# Allegro board EGR 314.brd
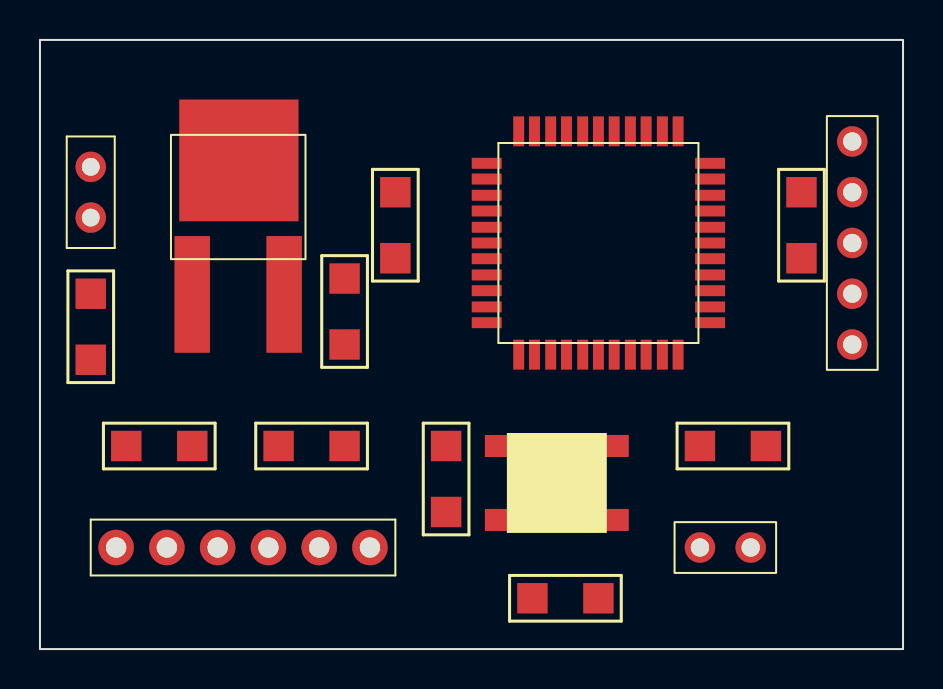
[diagram p0: board, top side]
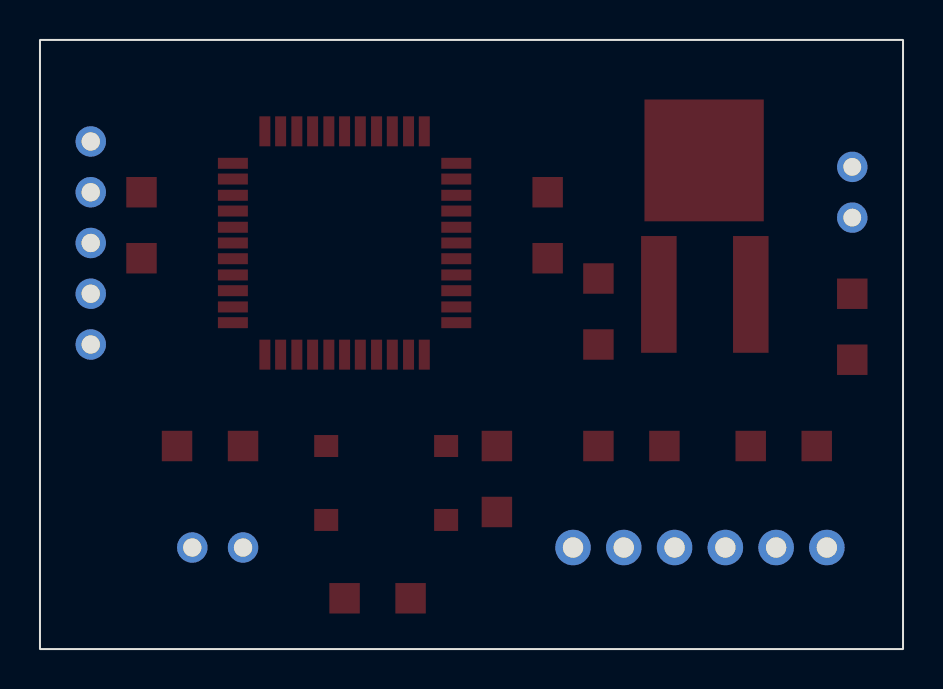
[diagram p1: board, bottom side, seen from below]

Outline 43.18 x 30.48 mm; copper layers: TOP, BOTTOM. Coordinates in mm from the lower left corner of the outline.
Outline path: rectangle 0,0 43.18,30.48

## Placement (name value [footprint] x y rotation side)
BT1  7.2V  [HEADER2]  2.54 22.86 0 top
C1  0.1uF, 15V  [SMC1206]  2.54 17.78 270 top
C2  0.1uF, 15V  [SMC1206]  15.24 15.24 90 top
C3  0.1uF, 15V  [SMC1206]  38.1 22.86 270 top
C4  0.1 uF, 15V  [SMC1206]  27.94 2.54 180 top
C5  0.1uF, 15V  [SMC1206]  17.78 22.86 270 top
J1  JUMPER  [JUMPER2]  33.02 5.08 0 top
J2  CON6  [HEADER6]  10.16 5.08 270 top
J3  HEADER 5  [JUMPER5]  40.64 15.24 90 top
R1  10 kohm, 1/4W  [SMR1206]  33.02 10.16 0 top
R2  220 ohm, 1/4W  [SMR1206]  20.32 10.16 270 top
R3  22 ohm, 1/4W  [SMR1206]  7.62 10.16 180 top
R4  22 ohm, 1/4W  [SMR1206]  15.24 10.16 180 top
SW1  SW PUSHBUTTON-SPST-2  [SMDSWITCH]  22.86 10.16 0 top
U1  LD29150DT33R  [TO252AA]  7.62 17.78 0 top
U2  PIC18F47K40-I/PT  [TQFPPIC18F47K40]  27.94 20.32 0 top

## Library data of the parts
BT1 = BATTERY
C1-C5 = CAP NP
J1 = JUMPER: User Part Number: ***
J2 = CON6
J3 = HEADER 5: User Part Number: ***
R1-R4 = R
SW1 = SW PUSHBUTTON-SPST-2
U1 = LD29150DT33R
U2 = PIC18F47K40-I/PT_2

## Footprints (pads in the part's own frame, mm; a bottom-side part is the same pattern mirrored in y, then rotated)
HEADER2
  round 1.524 hole 0.889: 1(0,1.27) 2(0,-1.27)
HEADER6
  round 1.778 hole 1.016: 1(0,6.35) 2(0,3.81) 3(0,1.27) 4(0,-1.27) 5(0,-3.81) 6(0,-6.35)
JUMPER2
  round 1.524 hole 0.914: 1(0,0) 2(2.54,0)
JUMPER5
  round 1.524 hole 0.914: 1(0,0) 2(2.54,0) 3(5.08,0) 4(7.62,0) 5(10.16,0)
SMC1206
  rect 1.524x1.524 smd: 1(0,0) 2(3.302,0)
SMDSWITCH
  rect 1.2x1.1 smd: 1(0,0) 2(6,0) 3(0,-3.7) 4(6,-3.7)
SMR1206
  rect 1.524x1.524 smd: 1(0,0) 2(3.302,0)
TO252AA
  rect 1.778x5.842 smd: 1(-0.004,-0.034) 3(4.596,-0.034)
  rect 5.969x6.096 smd: 2(2.332,6.673)
TQFPPIC18F47K40
  rect 1.5x0.55 smd: 1(-5.588,3.988) 2(-5.588,3.2) 3(-5.588,2.388) 4(-5.588,1.6) 5(-5.588,0.787) 6(-5.588,0) 7(-5.588,-0.787) 8(-5.588,-1.6) 9(-5.588,-2.388) 10(-5.588,-3.2) 11(-5.588,-3.988) 23(5.588,-3.988) 24(5.588,-3.2) 25(5.588,-2.388) 26(5.588,-1.6) 27(5.588,-0.787) 28(5.588,0) 29(5.588,0.787) 30(5.588,1.6) 31(5.588,2.388) 32(5.588,3.2) 33(5.588,3.988)
  rect 0.55x1.5 smd: 12(-3.988,-5.588) 13(-3.2,-5.588) 14(-2.388,-5.588) 15(-1.6,-5.588) 16(-0.787,-5.588) 17(0,-5.588) 18(0.787,-5.588) 19(1.6,-5.588) 20(2.388,-5.588) 21(3.2,-5.588) 22(3.988,-5.588) 34(3.988,5.588) 35(3.2,5.588) 36(2.388,5.588) 37(1.6,5.588) 38(0.787,5.588) 39(0,5.588) 40(-0.787,5.588) 41(-1.6,5.588) 42(-2.388,5.588) 43(-3.2,5.588) 44(-3.988,5.588)

## Nets
3.3V: C2.1 C3.2 C5.2 J2.2 R1.1 U1.3(OUT) U2.7(VDD_0) U2.28(VDD_1)
GND: BT1.2(-) C1.2 C2.2 C3.1 C4.2 C5.1 J2.3 SW1.3 U1.2(GND) U2.6(VSS_0) U2.30(VSS_1)
ICSPCLK: R3.1 U2.16(ICSPCLK/RB6)
ICSPDAT: R4.1 U2.17(ICSPDAT/RB7)
MCLR/VPP: J2.1 R2.1 U2.18(VPP/MCLR/RE3)
N103726: BT1.1(+) C1.1 U1.1(IN)
N112049: J2.4 R4.2
N112053: J2.5 R3.2
N112388: J1.2 R1.2 R2.2 SW1.1
N112486: C4.1 J1.1
N115043: J3.1 U2.23(RA4)
N115055: J3.2 U2.24(RA5)
N115065: J3.3 U2.25(RE0)
N115078: J3.4 U2.26(RE1)
N115090: J3.5 U2.27(RE2)

Pads without a net: J2 6; SW1 2 4; U2 1 2 3 4 5 8 9 10 11 12 13 14 15 19 20 21 22 29 31 32 33 34 35 36 37 38 39 40 41 42 43 44
